# Altium PCB CH340B_JUMPER.PcbDoc
Units mm, origin at the board's own origin, x right, y up, seen from the top; angles counter-clockwise.
Board outline 16.41 x 52.73 mm, 2 copper layers (Top Layer, Bottom Layer), stack 1.671 mm thick; 35 components, 20 nets, 100 pads, 98 vias.
Unrouted connection lines stored in the file: 51.
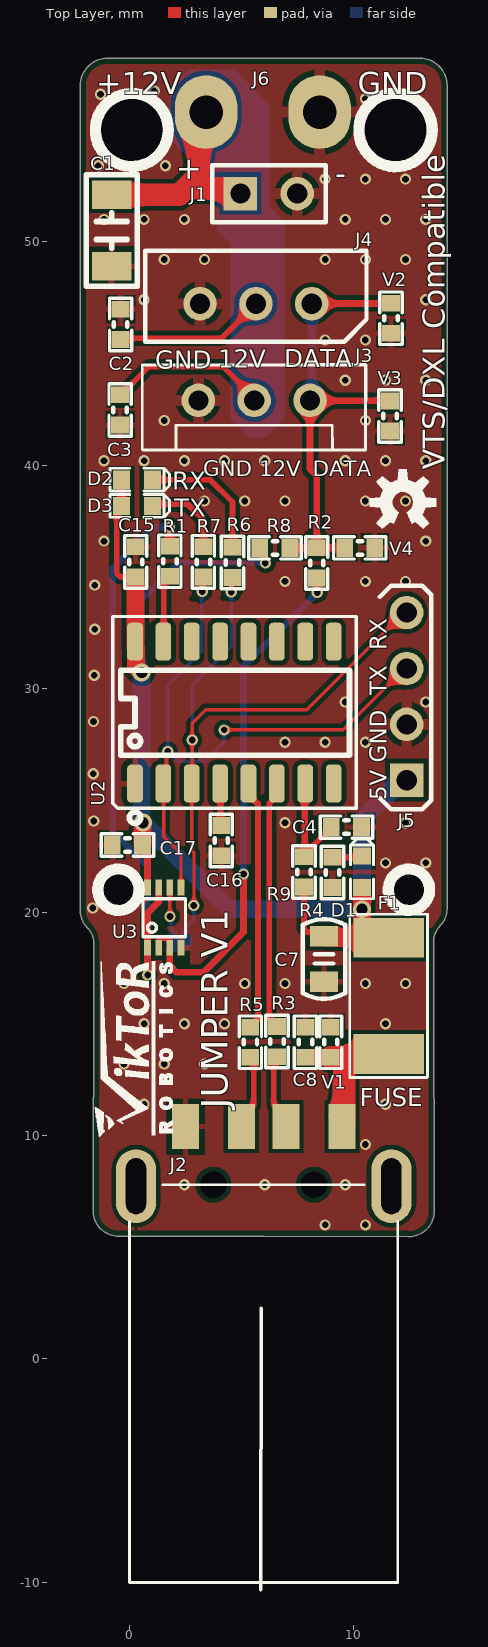
[diagram p0: Top Layer view]
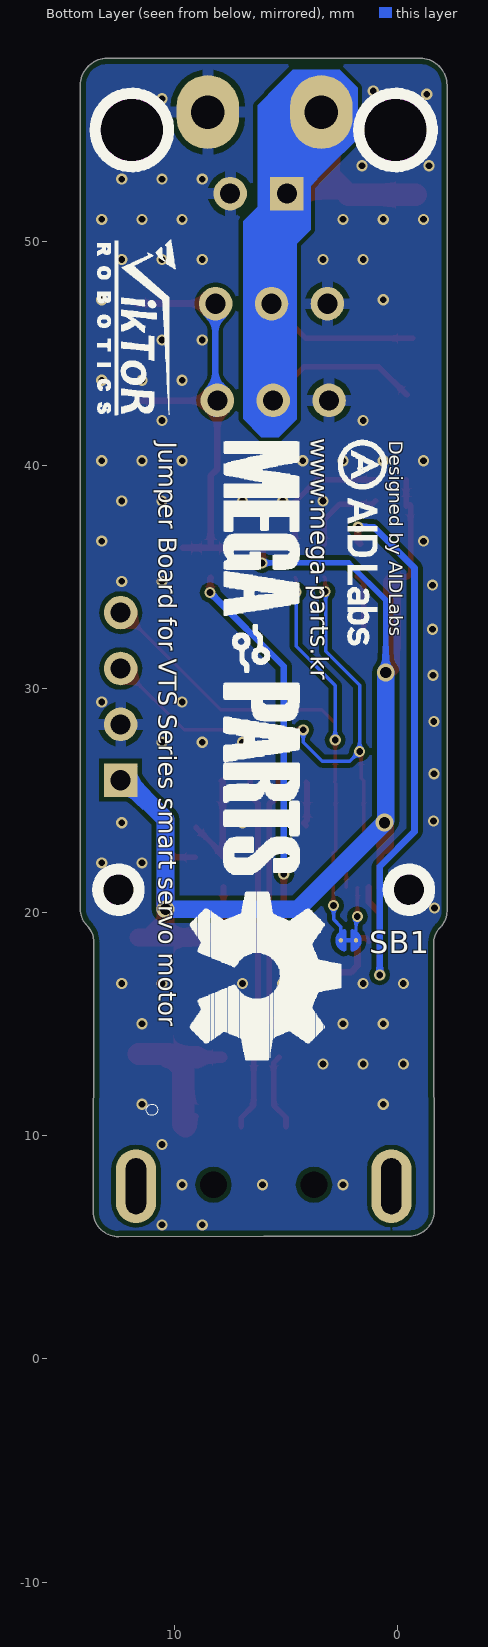
[diagram p1: Bottom Layer view, seen from below]
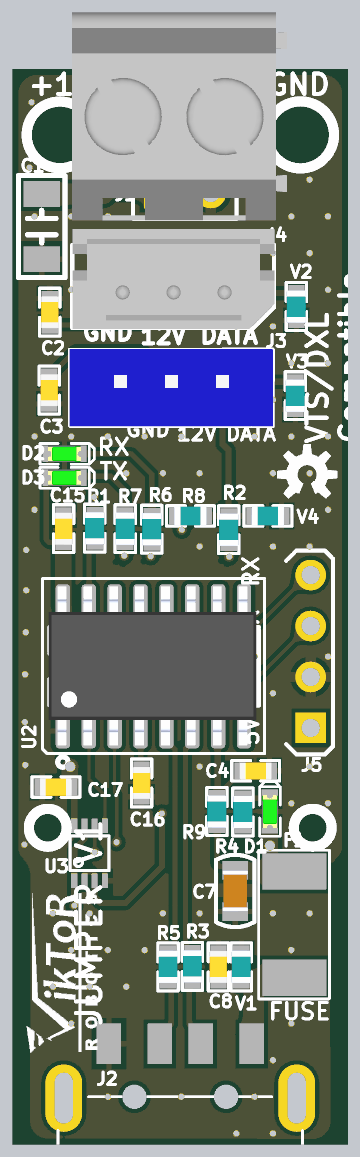
[diagram p2: 3D render of the assembled board from above, using the file's embedded part models]

## Layer stack, top to bottom
Top Solder: solder mask 0.0102, Solder Resist, Dk 3.5
Top Layer: signal copper 0.0356
Dielectric 3: core 1.6, FR-4, Dk 4.2
Bottom Layer: signal copper 0.0356
Bottom Solder: solder mask 0.0102, Solder Resist, Dk 3.5

## Board outline
-1.629,6.6 -1.604,16.8 -1.604,18.595 ccw(c-2.622,18.595) -1.902,19.315 cw(c-1.173,20.043) -2.204,20.043 -2.204,22.293 ccw(c-2.207,22.293) -2.204,22.295 cw(c-2.2,22.3) -2.206,22.3 -2.206,57 cw(c-2.2,57) -2.206,57 cw(c-1,57) -1,58.206 13,58.206 cw(c13,57) 14.206,57 cw(c13.905,57) 14.206,57 14.206,21.1 14.206,20.124 cw(c13.176,20.124) 13.905,19.395 ccw(c14.624,18.676) 13.606,18.676 13.606,18.5 cw(c13.6,18.5) 13.604,18.495 13.604,16.779 13.629,6.579 cw(c13.622,6.579) 13.628,6.577 cw(c12.5,6.601) 12.58,5.476 cw(c12.575,5.479) 12.575,5.473 12.52,5.473 cw(c12.5,6.599) 12.5,5.473 cw(c12.5,5.479) 12.498,5.473 6,5.494 -0.5,5.494 cw(c-0.5,6.622) -1.628,6.598 cw(c-1.622,6.6)
cut-out: 10.486,55 ccw(c11.9,55) 11.9,53.586 ccw(c11.9,55) 13.314,55 ccw(c11.9,55) 11.9,56.414 ccw(c11.9,55)
cut-out: -1.314,55 ccw(c0.1,55) 0.1,53.586 ccw(c0.1,55) 1.514,55 ccw(c0.1,55) 0.1,56.414 ccw(c0.1,55)
cut-out: 11.793,21 ccw(c12.5,21) 12.5,20.293 ccw(c12.5,21) 13.207,21 ccw(c12.5,21) 12.5,21.707 ccw(c12.5,21)
cut-out: -1.207,21 ccw(c-0.5,21) -0.5,20.293 ccw(c-0.5,21) 0.207,21 ccw(c-0.5,21) -0.5,21.707 ccw(c-0.5,21)

## Design rules (kind name [scope] priority, off if disabled: settings)
BoardOutlineClearance [All] p1: gap=0 ignorepadtopadclearanceinfootprint=FALSE except(0.254: Poly-OutlineEdge)
Clearance [All] p1: gap=0.2 ignorepadtopadclearanceinfootprint=FALSE except(0: Arc-Text Arc-Hole Track-Text Track-Hole SMDPad-Text SMDPad-Hole THPad-Text THPad-Hole Via-Text Via-Hole Fill-Text Fill-Hole Poly-Text Poly-Hole Region-Text Region-Hole Text-Text Text-Hole; 0.12: Arc-Arc Arc-Track Arc-SMDPad Arc-THPad Arc-Via Track-Track Track-SMDPad Track-THPad Track-Via SMDPad-SMDPad SMDPad-THPad SMDPad-Via THPad-THPad THPad-Via Via-Via)
ComponentClearance [All] p1 off: gap=0.25 collisioncheckmode=3 verticalgap=0.25 showdistances=FALSE
DiffPairsRouting [All] p1: maxlimit=1 minlimit=0.1 mostfreqgap=0.254 toplayer_minwidth=0.1 toplayer_maxwidth=0.5 toplayer_prefwidth=0.127 bottomlayer_minwidth=0.1 bottomlayer_maxwidth=0.5 bottomlayer_prefwidth=0.127 maxuncoupledlength=10
FabricationTestPointUsage TestPointUsage [All] p1 off: valid=0 allowmultiple=FALSE
FabricationTestpoint Testpoint [All] p1 off: side=3 testpointundercomponent=TRUE minsize=1.016 maxsize=2.54 preferedsize=1.524 minholesize=0 maxholesize=1.016 preferedholesize=0.813 testpointgrid=0.025 allowsidetop=TRUE allowsidebottom=TRUE usegrid=TRUE gridtolerance=0
Height [All] p1 off: minheight=0 maxheight=25.4 prefheight=12.7
HoleSize [All] p1: absolutevalues=TRUE maxlimit=6.3 minlimit=0.1 maxpercent=80.000 minpercent=20.000
HoleToHoleClearance [All] p1: gap=0 allowstackedmicrovias=TRUE
MinimumSolderMaskSliver [All] p1: minsoldermaskwidth=0.2
PlaneClearance PlaneClearance_1 [HoleDiameter <= 0.6] p1: clearance=0.12
PlaneClearance [All] p2: clearance=0.12
PlaneConnect PlaneConnect_1 [ISVIA] p1: planeconnectstyle=Direct reliefexpansion=0.508 reliefentries=4 reliefconductorwidth=0.254 reliefairgap=0.254
PlaneConnect PlaneConnect_2 [HoleDiameter <= 0.6] p2: planeconnectstyle=Relief reliefexpansion=0.15 reliefentries=4 reliefconductorwidth=0.3 reliefairgap=0.25
PlaneConnect [All] p3: planeconnectstyle=Relief reliefexpansion=0.5 reliefentries=4 reliefconductorwidth=0.3 reliefairgap=0.3
PolygonConnect [All] p1: thpad.connectstyle=Relief thpad.reliefconductorwidth=0.508 thpad.reliefentries=4 thpad.polygonreliefangle="90 Angle" thpad.airgapwidth=0.254 smdpad.connectstyle=Relief smdpad.reliefconductorwidth=0.254 smdpad.reliefentries=4 smdpad.polygonreliefangle="90 Angle" smdpad.airgapwidth=0.254 via.connectstyle=Direct via.reliefconductorwidth=0.3 via.reliefentries=4 via.polygonreliefangle="90 Angle" via.airgapwidth=0.254
RoutingVias [All] p1: holewidth=0.3 width=0.5 viastyle="Through Hole" minholewidth=0.1 minwidth=0.1 maxholewidth=1.5 maxwidth=1
ShortCircuit [InNet('UART_RX') vs InNet('NetSB1_1')] p1: allowed=TRUE
SilkToSilkClearance [All] p1: silktosilkclearance=0
SilkToSolderMaskClearance SilkscreenOverComponentPads [IsPad] p1: minsilkscreentomaskgap=0 clearancetoexposedcopper=TRUE
SolderMaskExpansion [All] p1: expansion=0 istentingtop=FALSE
Width [All] p1: maxlimit=5 minlimit=0.1 preferedwidth=0.154 checkconnectedcopper=TRUE
17 further rules are at their usual default settings.

## Classes and differential pairs
differential pair USBR: +USBR_P -USBR_N
differential pair USB: +USB_P -USB_N

## Components (designator, comment, footprint, x,y, rotation, side; value= is the part's Value field where it differs from the comment)
C1 "22uF/3216/25V" C3216-LJS -0.8,50.5 r90 top
C2 "CAP-CHIP-1005" CAPC1608X06L -0.4,46.3 r270 top value=100nF/50V
C3 "CAP-CHIP-1005" CAPC1608X06L -0.425,42.475 r90 top value=100nF/50V
C4 "100nF/1005" CAPC1608X06L 9.7,23.8 r180 top
C7 "22uF/2012" CAPC2012X00L 8.7,17.9 r270 top
C8 "100nF/1005" CAPC1608X06L 7.875,14.175 r90 top
C15 "100nF/1005" CAPC1608X06L 0.275,35.675 r90 top
C16 "100nF/1005" CAPC1608X06L 4.1,23.2 r270 top
C17 "CAP-CHIP-1005" CAPC1608X06L -0.1,23 r0 top value=100nF/50V
D1 "LED(RED)1608" LED_0603_G 10.4,21.8 r270 top
D2 "LED(BLUE)1608" LED_0603_G 0.325,39.35 r180 top
D3 "LED(GREEN)1608" LED_0603_G 0.325,38.175 r180 top
F1 "FUSE 500mA" FUSE1812 11.6,16.25 r90 top value=FUSE/3216/5V/500mA
J1 "Header 2" HDR1X2 4.96,52.15 r0 top
J2 "480-37-1000" MOLEX_480-37-1000 6,10.4 r180 top locked
J3 "JST B3B-EH-A" JST_B3B-EH-A 5.575,42.9 r180 top
J4 "5268-03A" 5267-03 5.65,47.225 r180 top
J5 "Header 4" 5267-04A-2.5P 12.4,28.4 r270 top
J6 "Header 2" BLOCK-5.08MMX2P_NO_SILK 3.42,55.8 r0 top
R1 "33R/1608" RESC1608X06L 1.8,35.7 r90 top
R2 "33R/1608" RESC1608X06L 8.375,35.625 r90 top
R3 "22R/1608" RESC1608X06L 6.6,14.2 r90 top
R4 "1K/1608" RESC1608X06L 9.075,21.775 r90 top
R5 "22R/1608" RESC1608X06L 5.4,14.175 r90 top
R6 "1K/1608" RESC1608X06L 4.6,35.65 r90 top
R7 "1K/1608" RESC1608X06L 3.3,35.675 r90 top
R8 "RES-CHIP-1005" RESC1608X06L 6.5,36.3 r180 top value=10kΩ/1005/J
R9 "RES-CHIP-1005" RESC1608X06L 7.8,21.8 r270 top value=10kΩ/1005/J
SB1 "Jumper" Solderbridge_Shorted 1.869,18.731 r0 bottom
U2 "CH340B" SOIC16P-50MIL 4.722,28.923 r0 top
U3 "NC7WZ241" MO-187_0.5_2.0X3.1 0.8,18.4 r0 top
V1 "IECS0505C040FR" RESC1608X06L 9,14.175 r270 top
V2 "IECS0505C040FR" RESC1608X06L 11.7,46.575 r270 top
V3 "IECS0505C040FR" RESC1608X06L 11.65,42.2 r270 top
V4 "IECS0505C040FR" RESC1608X06L 10.3,36.3 r180 top

## Footprints (in the part's own frame and the unit in brackets; to place one, negate y for a bottom-side part, rotate by r counter-clockwise, add the part's x,y. Pads: shape width x height; smd on the part's side, far side on the other; paste and mask are expansions set on the pad)
5267-03 [mm]
  round 1.5 hole 0.9: 1(-2.5,0) 2(0,0) 3(2.5,0)
  silkscreen extent -4.95,-2.38 4.95,1.7, body extent -4.98,-3.15 4.93,1.76, height 5.95
5267-04A-2.5P [mm]
  rect 1.5x1.5 / inner round 1.5 / far side rect 1.5x1.5 hole 0.9: 1(2.5,0)
  round 1.5 hole 0.9: 2(0,0) 3(-2.5,0) 4(-5,0)
BLOCK-5.08MMX2P_NO_SILK [mil]
  oval 110x130 hole 59.06: 1(0,0) 2(200,0)
  body extent -107,-197 308,205, height 567
C3216-LJS [mm]
  rect 1.27x1.778 smd: 1(1.6,0) 2(-1.6,0)
  silkscreen extent -2.5,-1.14 2.5,1.14, body extent -2.07,-0.82 2.1,0.8, height 1.5
CAPC1608X06L [mm]
  rect 0.75x0.8 smd: 1(-0.675,0) 2(0.675,0)
  silkscreen extent -1.18,-0.5 1.18,0.5, body extent -0.8,-0.43 0.8,0.43, height 0.8
CAPC2012X00L [mil]
  rect 36x50 smd: 1(-40,0) 2(40,0)
  silkscreen extent -70,-37 70,37, body extent -39,-25 39,25, height 48
FUSE1812 [mm] "PTC 1812"
  rect 1.78x3.15 smd: 1(-2.605,0) 2(2.605,0)
  silkscreen extent -3.65,-1.73 3.65,1.75, body extent -2.26,-1.52 2.31,1.52, height 1
HDR1X2 [mm] "Connector; Header; 2 Position"
  rect 1.5x1.5 hole 0.9: 1(0,0)
  round 1.5 hole 0.9: 2(2.54,0)
  silkscreen extent -1.27,-1.27 3.81,1.27
JST_B3B-EH-A [mm] "2.5mm pitch"
  round 1.5 hole 0.9: 1(-2.5,0) 2(0,0) 3(2.5,0)
  silkscreen extent -5,-1.6 5.01,2.22, body extent -4.99,-1.6 5.01,2.2, height 6
LED_0603_G [mil]
  rect 30x32 smd: 1(-27.5,0) 2(27.5,0)
  silkscreen extent -58,-20 48,20, body extent -32,-16 32,16, height 24
MO-187_0.5_2.0X3.1 [mm]
  rect 0.3x0.7 smd mask+0.01: 1(0,0) 2(0.5,0) 3(1,0) 4(1.5,0) 5(1.5,2.7) 6(1,2.7) 7(0.5,2.7) 8(0,2.7)
  silkscreen extent -0.2,0.5 1.7,2.2, body extent -0.43,0.35 1.88,2.35, height 0.9
MOLEX_480-37-1000 [mm]
  rect 1.2x2 smd: 1(-3.5,0) 2(-1,0) 3(1,0) 4(3.5,0)
  oval 1.8x3.3 hole 0.9 slot 2.5 at 90 deg: ""(-5.715,2.667) ""(5.715,2.667)
  round 1.1 hole 1.2 unplated: ""(-2.25,2.6) ""(2.25,2.6)
  silkscreen extent -6,2.6 6,20.4, body extent -5.98,1.9 6.02,20.7, height 4.55
RESC1608X06L [mm]
  rect 0.75x0.8 smd: 1(-0.675,0) 2(0.675,0)
  silkscreen extent -1.17,-0.5 1.17,0.5, body extent -0.8,-0.48 0.8,0.48, height 0.8
SOIC16P-50MIL [mm]
  rrect50% 0.7x1.7 smd: 1(-4.483,-3.175) 2(-3.213,-3.175) 3(-1.943,-3.175) 4(-0.673,-3.175) 5(0.597,-3.175) 6(1.867,-3.175) 7(3.137,-3.175) 8(4.408,-3.175) 9(4.408,3.175) 10(3.137,3.175) 11(1.867,3.175) 12(0.597,3.175) 13(-0.673,3.175) 14(-1.943,3.175) 15(-3.213,3.175) 16(-4.483,3.175)
  silkscreen extent -5.48,-4.95 5.42,4.3, body extent -5.18,-3.87 5.02,3.93, height 2
Solderbridge_Shorted [mm]
  round 0.2 smd paste-10: 1(0,0) 2(0.676,0)
  Top Layer region: 0.44,0.432 0.516,0.505 0.634,0.467 0.699,0.424 0.772,0.351 0.825,0.292 0.884,0.193 0.912,0.099 0.907,-0.122 0.881,-0.193 0.798,-0.33 0.714,-0.411 0.622,-0.469 0.521,-0.5 0.47,-0.483 0.44,-0.43
  Top Layer region: 0.236,-0.432 0.16,-0.505 0.042,-0.467 -0.023,-0.424 -0.097,-0.351 -0.15,-0.292 -0.208,-0.193 -0.236,-0.099 -0.231,0.122 -0.206,0.193 -0.122,0.33 -0.038,0.411 0.054,0.469 0.155,0.5 0.206,0.483 0.236,0.43
  Top Layer lines w0.152: 0.159,0.431 ccw(c0.27,0) -0.149,-0.149 ccw(c0.27,0) 0,-0.353 ccw(c0.27,0) 0.159,-0.431 ; 0.516,0.431 cw(c0.406,0) 0.516,-0.431
  Top Layer lines w0.203: 0,0 0.676,0

## Part data
C1 C4 C7 C8 C15 C16: library part CAP_0402, "Capacitor, NP0, ±0.1pF"
D1 D2 D3: library part D:LED, "LED SMARTLED GREEN 570NM 0603"
F1: library part 0ZCJ0050AF2E, "1206 SMT PPTC", Package="1206 Bel Fuse", Availability=Unavailable, MF="Bel Fuse", MP=0ZCJ0050AF2E, Price=None, SnapEDA_Link=https://www.snapeda.com/parts/0ZCJ0050AF2E/Bel%20Fuse%20Inc./view-part/1301170/?ref=snap
J1 J6: "Header, 2-Pin", LatestRevisionDate=17-Jul-2002, LatestRevisionNote="Re-released for DXP Platform.", Publisher="Altium Limited"
J2: "USB-A _USB TYPE-A_ USB 2.0 Plug Connector 4 Position Surface Mount, Right Angle; Through Hole", Package=None, Availability=Unavailable, MF=Molex, MP=48037-1000, Price=None, SnapEDA_Link=https://www.snapeda.com/parts/48037-1000/Molex/view-part/431726/?ref=snap
J3: library part 5268-03A
J5: "Header, 4-Pin", LatestRevisionDate=17-Jul-2002, LatestRevisionNote="Re-released for DXP Platform.", Publisher="Altium Limited"
R1 R2 R3 R4 R5 R6 R7: library part RES_0603, "Not mounted"
SB1: "Jumper Wire", LatestRevisionDate=17-Jul-2002, LatestRevisionNote="Re-released for DXP Platform.", PackageDescription="Radial Cap, Thru-Hole; 2 Leads; 0.2 in Pin Spacing", PackageReference=RAD-0.2, Published=24-Mar-1999, Publisher="Altium Limited"
V1 V2 V3 V4: library part "DIODE TVS_1"
C2 C3 C17 R8 R9: PCB DECAL=1005, size=1005

## Via types
v1: diameter 0.5, hole 0.3, Top Layer to Bottom Layer, tented both sides, 95 vias
v2: diameter 0.8, hole 0.5, Top Layer to Bottom Layer, tented both sides, 3 vias

## Nets (pads, with @x,y where several pads share a name; then routed paths per layer and width w, separated by ;. In a path a pad name is that pad's centre, name@x,y a point inside that pad or via, vN(x,y) a via of type N, cw(c..) or ccw(c..) an arc to the next point about the centre after c; other vN are vias at no path point)
12V: C1.1 C2.2 C3.2 J1.1 J3.2 J4.2 J6.1 | length 41.5
  Top Layer w0.254: C2.2@-0.675,45.675 4.1,45.675 J4.2 ; C3.2 -0.4,43.15 0.85,44.4 4.2,44.4 5.575,43.025 J3.2
  Top Layer w1: C1.1 2.214,52.1 2.607,52.493 ; J6.1 3.077,55.457 3.077,52.963 2.607,52.493 ; J1.1 4.72,52.39 2.71,52.39 2.607,52.493
  Bottom Layer w1: J6.1 3.492,55.728 3.492,53.618 J1.1 ; 4.96,55.3 4.96,53.065 5.65,52.375 5.65,48.875 5.663,48.863 5.663,42.312 J3.2@5.675,42.3
DATA: J3.1 J4.1 R2.2 R8.1 V2.1 V3.1 V4.2 | length 21.3
  Top Layer w0.3: R8.1 R2.2 ; J4.1 8.162,47.237 11.687,47.237 V2.1 ; V4.2 R2.2 ; V3.1 11.637,42.887 8.088,42.887 J3.1 8.075,39.825 8.375,39.525 R2.2
  Bottom Layer w0.3: J4.1 8.163,47.212 8.163,42.313 J3.1@8.175,42.3
GND: C1.2 C2.1 C3.1 C4.1 C7.2 C8.2 C15.2 C16.2 C17.1 J1.2 J2.4 J3.3 J4.3 J5.2 J6.2 R4.1 U2.1 U3.4 V1.1 V2.2 V3.2 V4.1
  other v1: 8.75,6 10.55,6 2.45,7.8 6.05,7.8 9.65,7.8 10.55,9.6 0.65,11.4 11.45,11.4 -0.25,13.2 1.55,13.2 3.35,13.2 0.65,15 2.45,15 4.25,15 11.45,15 -0.25,16.8 1.55,16.8 5.15,16.8 6.95,16.8 10.55,16.8 12.35,16.8 -1.648,20.179 11.45,22.2 13.25,22.2 6.95,24 12.35,24 -1.603,24.078 -1.626,26.191 6.95,27.6 8.75,27.6 10.55,27.6 -1.615,28.528 9.65,29.4 13.25,29.4 -1.581,30.596 -1.558,32.653 -1.558,34.63 6.95,34.8 10.55,34.8 12.35,34.8 -1.15,36.6 13.25,36.6 3.35,38.4 5.15,38.4 6.95,38.4 10.55,38.4 12.35,38.4 -1.15,40.2 0.65,40.2 2.45,40.2 4.25,40.2 6.05,40.2 9.65,40.2 11.45,40.2 13.25,40.2 1.55,42 10.55,42 9.65,43.8 11.45,43.8 13.25,43.8 8.75,45.6 10.55,45.6 0.65,47.4 13.25,47.4 1.55,49.2 3.35,49.2 8.75,49.2 10.55,49.2 12.35,49.2 -1.15,51 0.65,51 2.45,51 9.65,51 11.45,51 13.25,51 8.75,52.8 10.55,52.8 12.35,52.8 -1.4,53.4 1.6,53.4 10.55,56.4 -1.3,56.6 1.1,56.744
NetC4_2: C4.2 R9.1 U2.7 | length 5.3
  Top Layer w0.254: R9.1 7.825,22.475 8.073,22.723 8.073,22.823 9.025,23.775 C4.2
  Top Layer w0.3: R9.1 7.838,22.513 7.838,25.838 U2.7@7.875,25.875
NetC8_1: C8.1 F1.1 J2.1 V1.2 | length 7.9
  Top Layer w0.3: J2.1@9.05,10.85 J2.1
  Top Layer w0.508: C8.1 V1.2
  Top Layer w1: V1.2 F1.1@10.25,13.5 ; J2.1 9.6,10.5 9.6,12.995 10.25,13.645 F1.1
NetC16_1: C16.1 U2.4 | length 2
  Top Layer w0.254: C16.1 4.2,23.975 4.2,24 4.188,24 4.065,24.123 4.065,25.765 U2.4@4.1,25.8
NetD1_1: D1.1 R4.2 | length 1.3
  Top Layer w0.254: R4.2 10.352,22.45 D1.1
NetD2_1: D2.1 R6.2 | length 6
  Top Layer w0.254: D2.1@0.937,39.35 3.6,39.35 4.6,38.35 R6.2@4.6,36.475
NetD3_1: D3.1 R7.2 | length 3.7
  Top Layer w0.254: D3.1@0.999,38.4 1.149,38.25 2.6,38.25 3.3,37.55 R7.2@3.3,36.475
NetR1_1: R1.1 U2.15 | length 2.3
  Top Layer w0.254: U2.15@1.525,32.805 1.525,34.775 1.775,35.025 R1.1
NetR2_1: R2.1 U3.2 U3.3 | length 23.1
  Top Layer w0.254: U3.2@1.3,18.7 1.441,18.841 1.651,18.841 1.8,18.692 U3.3
  Top Layer w0.3: U3.3 1.8,17.6 2.1,17.3 3.3,17.3 5.1,19.1 v1(5.1,21.7) ; R2.1 8.388,34.938 8.388,34.312 v1(8.4,34.3)
  Bottom Layer w0.3: v1(5.1,21.7) 5.1,31 v1(8.4,34.3)
NetSB1_1: SB1.1 U3.6 | length 2.4
  Top Layer w0.154: U3.6 1.805,21.095 1.805,19.802 v1(1.809,19.797)
  Bottom Layer w0.152: v1(1.809,19.797) 1.869,19.738 1.869,19.084 SB1.1
TX_ENABLE: R1.2 U3.1 U3.7 | length 27.1
  Top Layer w0.3: v1(0.807,17.188) 0.8,17.194 U3.1 0.8,19.954 1.3,20.454 U3.7 ; R1.2@1.687,36.487 1.787,36.587 1.787,37.213 v1(1.775,37.225)
  Bottom Layer w0.3: 0.8,21.8 0.8,21.325 0.807,21.318 v1(0.807,17.188) ; 0.801,21.801 0.801,22.049 -0.75,23.6 -0.75,35.4 1.075,37.225 1.55,37.225 1.575,37.25 1.775,37.25 v1(1.775,37.225)
UART_RX: J5.4 R6.1 SB1.2 U2.3 | length 29.4
  Top Layer w0.154: U2.3 2.78,22.75 2.882,22.648 2.882,20.302 v1(2.872,20.293) ; v1@2.798,27.698 2.798,25.878 2.795,25.875 U2.3@2.851,25.819 ; v1(2.8,27.7) 2.8,28.446 3.41,29.057 7.927,29.057 J5.4@12.25,33.38 ; v1(4.55,34.325) 4.55,34.925 R6.1
  Bottom Layer w0.154: SB1.2 2.545,19.34 2.872,19.667 v1(2.872,20.293) ; v1(2.8,27.7) 2.8,30.138 4.55,31.888 v1(4.55,34.325)
UART_TX: J5.3 R7.1 U2.2 U3.5 | length 27.7
  Top Layer w0.154: v1(1.707,27.187) 1.641,27.121 1.641,25.991 1.525,25.875 1.525,23.375 2.3,22.6 U3.5 ; v1(3.25,34.35) 3.25,34.95 R7.1 ; v1(4.23,28.152) 9.562,28.152 J5.3@12.25,30.84
  Bottom Layer w0.154: v1(3.25,34.35) 3.226,34.326 3.226,31.676 1.707,30.157 v1(1.707,27.187) 2.147,26.747 3.382,26.747 4.23,27.595 v1(4.23,28.152)
USB_5V: C7.1 C15.1 C17.2 D1.2 D2.2 D3.2 F1.2 J5.1 R8.2 R9.2 U2.16 U3.8 | length 54.9
  Top Layer w0.254: D3.2@-0.55,38.223 -0.575,38.198 -0.575,35.149 -0.426,35 C15.1 ; D3.2 D2.2 ; R8.2@5.825,36.5 6.028,36.297 6.028,35.672 v1(6.075,35.625) ; R9.2 7.8,19.255 7.949,19.106 C7.1@8.113,19.106
  Top Layer w0.3: U3.8 C17.2@0.8,22.75
  Top Layer w0.8: C15.1@0.255,34.755 0.255,32.805 0.255,31.845 0.29,31.81 0.29,30.972 v2(0.54,30.723) ; C17.2 0.575,23.975 v2(0.6,24) ; C7.1 8.761,18.855 F1.2@11.14,18.855 ; D1.2 v2(10.4,20.125) 10.4,19.595 F1.2@11.14,18.855 ; F1.2 F1.2@11.14,18.855
  Bottom Layer w0.254: v2(0.54,30.723) 0.54,33.965 2.2,35.625 v1(6.075,35.625)
  Bottom Layer w0.8: v2(0.54,30.723) 0.54,24.09 0.6,24.029 v2(0.6,24) 4.475,20.125 v2(10.4,20.125) 10.4,24.15 J5.1@12.25,26
USB_N: J2.2 R3.1 | length 3.4
  Top Layer w0.254: R3.1@6.5,13.525 6.444,13.469 6.444,11.356 7,10.8 J2.2
USB_P: J2.3 R5.1 | length 3.4
  Top Layer w0.254: J2.3 5,10.8 5.556,11.356 5.556,13.252 5.308,13.5 R5.1@5.3,13.5
USBR_N: R3.2 U2.6 | length 11.3
  Top Layer w0.254: R3.2 6.575,14.875 6.254,15.196 6.254,24.868 6.403,25.017 6.414,25.017 6.606,25.209 U2.6@6.606,25.875
USBR_P: R5.2 U2.5 | length 11.4
  Top Layer w0.254: U2.5@5.335,25.875 5.335,25.209 5.511,25.033 5.552,25.033 5.746,24.838 5.746,15.171 5.425,14.85 R5.2
pads on no net: J2. U2.8 U2.9 U2.10 U2.11 U2.12 U2.13 U2.14

## Polygon pours and split planes (outlines as drawn)
GND on Bottom Layer "GND_L02_P002" (solid, pour order 2): -1.629,6.6 -1.604,16.8 -1.604,18.595 ccw(c-2.622,18.595) -1.902,19.315 cw(c-1.173,20.043) -2.204,20.043 -2.204,22.293 ccw(c-2.207,22.293) -2.204,22.295 cw(c-2.2,22.3) -2.206,22.3 -2.206,57 cw(c-2.2,57) -2.206,57 cw(c-1,57) -1,58.206 13,58.206 cw(c13,57) 14.206,57 cw(c13.905,57) 14.206,57 14.206,21.1 14.206,20.124 cw(c13.176,20.124) 13.905,19.395 ccw(c14.624,18.676) 13.606,18.676 13.606,18.5 cw(c13.6,18.5) 13.604,18.495 13.604,16.779 13.629,6.579 cw(c13.622,6.579) 13.628,6.577 cw(c12.5,6.601) 12.58,5.476 cw(c12.575,5.479) 12.575,5.473 12.52,5.473 cw(c12.5,6.599) 12.5,5.473 cw(c12.5,5.479) 12.498,5.473 6,5.494 -0.5,5.494 cw(c-0.5,6.622) -1.628,6.598 cw(c-1.622,6.6)
GND on Top Layer "GND_L01_P003" (solid, pour order 3): -1.629,6.6 -1.604,16.8 -1.604,18.595 ccw(c-2.622,18.595) -1.902,19.315 cw(c-1.173,20.043) -2.204,20.043 -2.204,22.293 ccw(c-2.207,22.293) -2.204,22.295 cw(c-2.2,22.3) -2.206,22.3 -2.206,57 cw(c-2.2,57) -2.206,57 cw(c-1,57) -1,58.206 13,58.206 cw(c13,57) 14.206,57 cw(c13.905,57) 14.206,57 14.206,21.1 14.206,20.124 cw(c13.176,20.124) 13.905,19.395 ccw(c14.624,18.676) 13.606,18.676 13.606,18.5 cw(c13.6,18.5) 13.604,18.495 13.604,16.779 13.629,6.579 cw(c13.622,6.579) 13.628,6.577 cw(c12.5,6.601) 12.58,5.476 cw(c12.575,5.479) 12.575,5.473 12.52,5.473 cw(c12.5,6.599) 12.5,5.473 cw(c12.5,5.479) 12.498,5.473 6,5.494 -0.5,5.494 cw(c-0.5,6.622) -1.628,6.598 cw(c-1.622,6.6)

## Other copper
Top Layer:
  pour cut-out: 0.921,24.803 0.746,24.803 ccw(c0.746,24.678) 0.621,24.678 ccw(c0.771,24.678) 0.771,24.528 0.796,24.528 ccw(c0.796,24.703) 0.971,24.703 0.971,24.753
  pour cut-out: 0.131,24.58 -0.044,24.58 ccw(c-0.044,24.455) -0.169,24.455 ccw(c-0.019,24.455) -0.019,24.305 0.006,24.305 ccw(c0.006,24.48) 0.181,24.48 0.181,24.53
  pour cut-out: 9.744,23.567 9.569,23.567 ccw(c9.569,23.442) 9.444,23.442 ccw(c9.594,23.442) 9.594,23.292 9.619,23.292 ccw(c9.619,23.467) 9.794,23.467 9.794,23.517
  pour cut-out: 8.43,24.305 8.255,24.305 ccw(c8.255,24.18) 8.13,24.18 ccw(c8.28,24.18) 8.28,24.03 8.305,24.03 ccw(c8.305,24.205) 8.48,24.205 8.48,24.255
  pour cut-out: 8.577,22.246 8.402,22.246 ccw(c8.402,22.121) 8.277,22.121 ccw(c8.427,22.121) 8.427,21.971 8.452,21.971 ccw(c8.452,22.146) 8.627,22.146 8.627,22.196
  pour cut-out: 8.776,37.023 8.601,37.023 ccw(c8.601,36.898) 8.476,36.898 ccw(c8.626,36.898) 8.626,36.748 8.651,36.748 ccw(c8.651,36.923) 8.826,36.923 8.826,36.973
  pour cut-out: 8.151,37.073 7.976,37.073 ccw(c7.976,36.948) 7.851,36.948 ccw(c8.001,36.948) 8.001,36.798 8.026,36.798 ccw(c8.026,36.973) 8.201,36.973 8.201,37.023
  pour cut-out: 9.151,36.823 8.976,36.823 ccw(c8.976,36.698) 8.851,36.698 ccw(c9.001,36.698) 9.001,36.548 9.026,36.548 ccw(c9.026,36.723) 9.201,36.723 9.201,36.773
  pour cut-out: 9.151,36.048 8.976,36.048 ccw(c8.976,35.923) 8.851,35.923 ccw(c9.001,35.923) 9.001,35.773 9.026,35.773 ccw(c9.026,35.948) 9.201,35.948 9.201,35.998
  pour cut-out: 8.426,34.073 8.251,34.073 ccw(c8.251,33.948) 8.126,33.948 ccw(c8.276,33.948) 8.276,33.798 8.301,33.798 ccw(c8.301,33.973) 8.476,33.973 8.476,34.023
  pour cut-out: 8.151,34.223 7.976,34.223 ccw(c7.976,34.098) 7.851,34.098 ccw(c8.001,34.098) 8.001,33.948 8.026,33.948 ccw(c8.026,34.123) 8.201,34.123 8.201,34.173
  pour cut-out: 5.051,34.498 4.876,34.498 ccw(c4.876,34.373) 4.751,34.373 ccw(c4.901,34.373) 4.901,34.223 4.926,34.223 ccw(c4.926,34.398) 5.101,34.398 5.101,34.448
  pour cut-out: 4.349,34.198 4.174,34.198 ccw(c4.174,34.073) 4.049,34.073 ccw(c4.199,34.073) 4.199,33.923 4.224,33.923 ccw(c4.224,34.098) 4.399,34.098 4.399,34.148
  pour cut-out: 3.326,34.073 3.151,34.073 ccw(c3.151,33.948) 3.026,33.948 ccw(c3.176,33.948) 3.176,33.798 3.201,33.798 ccw(c3.201,33.973) 3.376,33.973 3.376,34.023
  pour cut-out: 2.976,34.173 2.801,34.173 ccw(c2.801,34.048) 2.676,34.048 ccw(c2.826,34.048) 2.826,33.898 2.851,33.898 ccw(c2.851,34.073) 3.026,34.073 3.026,34.123
  pour cut-out: 9.831,22.23 9.656,22.23 ccw(c9.656,22.105) 9.531,22.105 ccw(c9.681,22.105) 9.681,21.955 9.706,21.955 ccw(c9.706,22.13) 9.881,22.13 9.881,22.18
  pour cut-out: 1.376,19.698 1.201,19.698 ccw(c1.201,19.573) 1.076,19.573 ccw(c1.226,19.573) 1.226,19.423 1.251,19.423 ccw(c1.251,19.598) 1.426,19.598 1.426,19.648
  pour cut-out: 1.351,19.323 1.176,19.323 ccw(c1.176,19.198) 1.051,19.198 ccw(c1.201,19.198) 1.201,19.048 1.226,19.048 ccw(c1.226,19.223) 1.401,19.223 1.401,19.273
  pour cut-out: 1.551,19.473 1.376,19.473 ccw(c1.376,19.348) 1.251,19.348 ccw(c1.401,19.348) 1.401,19.198 1.426,19.198 ccw(c1.426,19.373) 1.601,19.373 1.601,19.423
  pour cut-out: 2.551,17.823 2.376,17.823 ccw(c2.376,17.698) 2.251,17.698 ccw(c2.401,17.698) 2.401,17.548 2.426,17.548 ccw(c2.426,17.723) 2.601,17.723 2.601,17.773
  pour cut-out: 8.476,14.273 8.301,14.273 ccw(c8.301,14.148) 8.176,14.148 ccw(c8.326,14.148) 8.326,13.998 8.351,13.998 ccw(c8.351,14.173) 8.526,14.173 8.526,14.223
  pour cut-out: 10.001,14.723 9.826,14.723 ccw(c9.826,14.598) 9.701,14.598 ccw(c9.851,14.598) 9.851,14.448 9.876,14.448 ccw(c9.876,14.623) 10.051,14.623 10.051,14.673
Bottom Layer:
  region net 12V: 2.6,57.7 1.8,56.9 1.8,54.6 3.1,53.3 5.8,56 5.8,56.6 4.7,57.7
  region net 12V: 4.5,56.575 3.9,55.975 3.9,50.525 4.525,49.9 4.525,42.05 5.325,41.25 6.1,41.25 6.925,42.075 6.925,50.925 6.275,51.575 6.275,56.1 5.8,56.575

## Silkscreen, mask and mechanical layers (free items; w line width, h text height)
Top Overlay:
  drawing of 1610 lines, arcs and shapes, not listed
  text "+12V" at -1.5,56.6 h1
  text "GND" at 10.2,56.6 h1
  text "+" at 3.1,53.8 h1 r90
  text "-" at 9.2,53.3 h1 r180
  text "DATA" at 6.925,44.375 h0.8
  text "GND" at 1.15,44.325 h0.8
  text "12V" at 3.975,44.35 h0.8
  text "VTS/DXL Compatible" at 14.1,39.8 h1 r90
  text "GND" at 3.3,39.5 h0.7
  text "12V" at 5.8,39.5 h0.7
  text "DATA" at 8.2,39.5 h0.7
  text "RX" at 1.9,38.9 h0.8
  text "TX" at 2,37.7 h0.8
  text "5V GND  TX  RX" at 11.5,25 h0.75 r90
  text "FUSE" at 10.3,11.3 h0.8
  text "JUMPER V1" at 4.4,11.2 h1.2 r90
Bottom Overlay:
  drawing of 4743 lines, arcs and shapes, not listed
  text "www.mega-parts.kr" at 3.9,41.2 h0.8 r90
  text "Designed by AIDLabs" at 0.386,41.086 h0.6 r90
  text "Jumper Board for VTS Series smart servo motor" at 10.697,41.054 h0.8 r90
Drill Drawing:
  circle w0.12: c-0.5,21 r0.707
  circle w0.12: c12.5,21 r0.707
  circle w0.12: c11.9,55 r1.414
  circle w0.12: c0.1,55 r1.414
  lines w0.012: -2.2,55.95 -2.2,56 ; -1.622,6.6 -1.597,16.8 -1.597,18.595 ccw(c-2.622,18.595) -1.897,19.319 cw(c-1.173,20.043) -2.197,20.043 -2.197,22.293 ccw(c-2.207,22.293) -2.2,22.3 -2.2,57 cw(c-1,57) -1,58.2 13,58.2 cw(c13,57) 14.2,57 14.2,21.1 14.2,20.124 cw(c13.176,20.124) 13.9,19.4 ccw(c14.624,18.676) 13.6,18.676 13.6,18.5 ; -1.622,6.622 ccw(c-0.5,6.622) -0.5,5.5 6,5.5 12.575,5.479 ; 12.5,5.479 ccw(c12.5,6.601) 13.622,6.601 ; 13.597,18.574 13.597,16.779 13.622,6.579
  text ".LEgend" at 23.55,6.55 h1.5